# Altium PCB oscill_pcb.PcbDoc (part 2 of 2)
Units mm, origin at the board's own origin, x right, y up, seen from the top; angles counter-clockwise.
Board outline 100 x 110 mm, 4 copper layers (Top Layer, GND, Power, Bottom Layer), stack 1.565 mm thick; 124 components, 88 nets, 532 pads, 164 vias.
Unrouted connection lines stored in the file: 9.
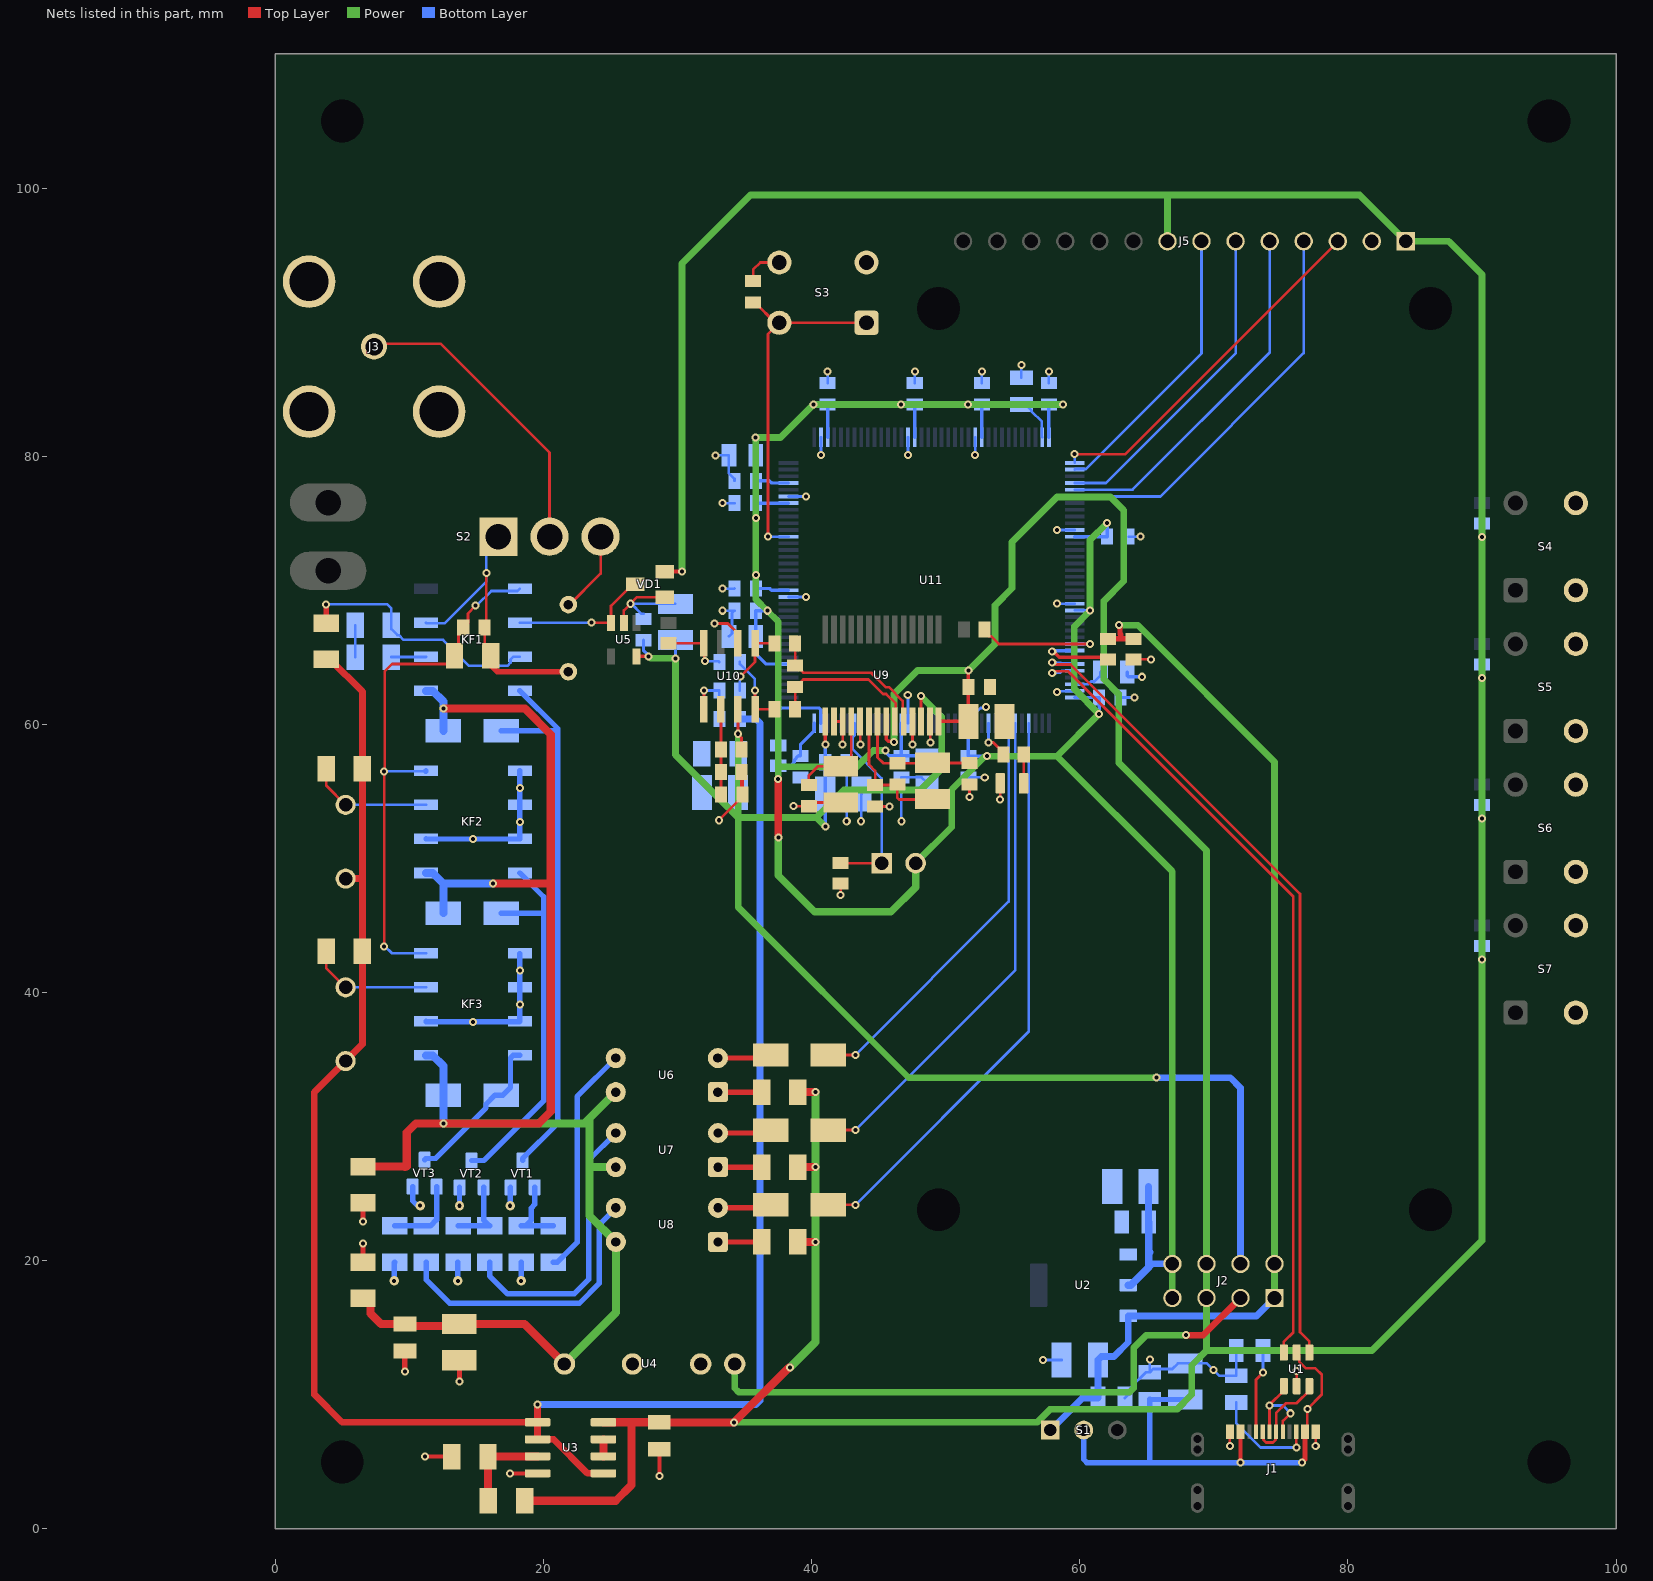
[diagram p4: the nets of this part, all layers, seen from the top]

## Via types
v1: diameter 0.6, hole 0.3, Top Layer to Bottom Layer, tented both sides, 154 vias
v2: diameter 0.7, hole 0.3, Top Layer to Bottom Layer, tented both sides, 6 vias
v3: diameter 0.6, hole 0.3, Power to Bottom Layer, tented both sides, 2 vias
v4: diameter 0.6, hole 0.3, Top Layer to GND, tented both sides, 1 vias
v5: diameter 0.6, hole 0.3, Top Layer to Power, tented both sides, 1 vias

## Nets (pads, with @x,y where several pads share a name; then routed paths per layer and width w, separated by ;. In a path a pad name is that pad's centre, name@x,y a point inside that pad or via, vN(x,y) a via of type N, cw(c..) or ccw(c..) an arc to the next point about the centre after c; other vN are vias at no path point) (continued)
GND: C1.2 C2.2 C3.2 C4.2 C5.2 C6.2 C7.2 C11.2 C12.2 C16.2 C17.2 C18.2 C19.2 C20.1 C23.2 C24.2 C25.2 C26.2 C27.2 C29.2 C30.1 C31.1 C32.1 C33.1 C34.1 C35.1 C36.1 C37.1 C38.1 C39.1 C40.2 C41.1 C42.1 C43.2 C44.2 C45.1 C46.2 C47.1 C48.1 HL1.1 J1.A1/B12 J1.B1/A12 J3.S1 J3.S2 J3.S3 J3.S4 J5.02 KF2.2 KF2.5 KF2.6 KF2.7 KF3.2 KF3.5 KF3.6 KF3.7 R1.2 R2.2 R4.1 R23.1 R30.1 R34.2 S3.3 S3.4 S4.3 S4.4 S5.3 S5.4 S6.3 S6.4 S7.3 S7.4 U1.2 U2.1 U3.4 U4.2 U5.2 U9.16 U9.17 U9.19 U9.25 U9.27 U10.6 U11.16 U11.31 U11.38 U11.51 U11.61 U11.83 U11.94 U11.107 U11.120 U11.130 VD1.1 | length 127.9
  Top Layer w0.2: U5.2@26,67.575 26,68.5 v1(26.495,68.995) 26.991,69.491 VD1.1@29.053,69.491 ; v4(32.775,67.525) 33.751,67.525 34.515,66.761 U10.6@34.515,66.05 ; v1(33.1,52.85) 33.1,52.874 34.775,54.549 R23.1@34.775,56.45 34.851,56.374 C29.2@34.851,54.775 ; C46.2@35.643,93.052 35.643,93.916 36.177,94.45 S3.4@37.6,94.45 ; v1(38.65,53.9) 39.793,53.9 C23.2@39.8,53.893 40.084,54.177 C24.2@42.181,54.177 ; U9.16@41.665,60.217 U9.17@42.325,60.217 v1(42.325,58.5) ; v1(42.175,47.265) R30.1@42.175,48.126 ; U9.19@43.62,60.217 43.635,60.202 43.635,58.515 v1(43.65,58.5) ; C20.1@44.743,53.884 44.752,53.875 v1(45.825,53.875) ; v1(47.525,58.5) v1@47.528,58.503 ; v1@47.531,58.506 v1@47.528,58.503 ; U9.25@47.532,60.217 47.528,60.213 v1@47.528,58.503 ; U9.27@48.827,60.217 48.857,60.188 48.857,58.679 v1(48.886,58.649) ; v1(51.775,54.6) C25.2@51.775,55.525 ; v1(54.071,54.384) HL1.1@54.071,55.608 ; R34.2@64.025,64.85 v1(65.3,64.85) ; v1(71.2,6.201) J1.A1/B12@71.2,7.247 ; U1.2@76.175,10.645 v1(76.176,11.776) ; v1(77.601,6.201) J1.B1/A12@77.601,7.247
  Top Layer w0.3: v1(11.175,5.4) R4.1@13.169,5.399 ; v1(17.52,4.145) U3.4@19.57,4.145 ; v1(28.65,3.95) C7.2@28.65,5.95
  Power w0.2: v1(55.65,86.787) v1@55.663,86.8
  Bottom Layer w0.2: v1(26.495,68.995) v1@26.568,68.995 ; C12.2@27.465,68.248 27.315,68.248 v1@26.568,68.995 ; C11.2@29.835,68.995 v1@26.568,68.995 ; v1(32.839,80.064) C45.1@33.836,80.064 33.836,78.721 34.25,78.307 C44.2@34.25,78.157 ; v1(33.35,68.475) C43.2@34.25,68.475 34.075,68.3 34.075,66.791 C42.1@33.844,66.56 ; v1(33.35,70.125) 34.243,70.125 C30.1@34.25,70.132 ; v1(33.35,76.5) C31.1@34.25,76.5 ; U11.16@38.28,69.5 v1(39.6,69.5) ; U11.31@38.28,77 v1(39.6,77) ; v1(40.7,80.1) U11.38@40.7,81.42 ; C32.1@41.2,85.45 v1(41.2,86.325) ; v1(42.625,52.775) C18.2@42.625,57.175 ; v1(43.7,52.775) 43.7,54.768 C19.2@43.726,54.794 ; v1(46.7,52.775) C39.1@46.7,56.05 48.206,56.05 C41.1@48.607,55.649 ; v1(47.175,62.2) 47.2,62.175 U11.130@47.2,60.08 ; v1(47.2,80.1) U11.51@47.2,81.42 ; C33.1@47.7,85.45 v1(47.7,86.325) ; C38.1@51.7,56.05 v1(52.917,56.05) ; U11.120@52.2,60.08 52.2,60.809 52.615,61.223 52.923,61.223 v1(53,61.3) ; v1(52.2,80.1) U11.61@52.2,81.42 ; C34.1@52.7,85.45 v1(52.7,86.325) ; C47.1@55.65,85.85 v1(55.65,86.787) ; v1(57.275,12.6) C3.2@58.65,12.6 ; C35.1@57.7,85.45 v1(57.7,86.325) ; v1(58.3,69) U11.94@59.62,69 ; v1(58.3,74.5) U11.83@59.62,74.5 ; v1(58.307,62.428) 58.343,62.464 59.584,62.464 U11.107@59.62,62.5 ; C37.1@63.05,62 v1(64.1,62) ; C4.2@63.368,9.758 63.818,10.208 63.818,10.568 64.925,11.675 C2.2@65.225,11.675 ; C36.1@63.65,74 v1(64.525,74) ; v1(65.225,12.65) C2.2@65.225,11.675 ; R1.2@71.668,13.307 71.668,11.432 R2.2@71.675,11.425 70.4,11.425 v1(69.975,11.85) 69.475,12.35 C1.2@67.875,12.35 67.325,12.35 66.9,11.925 65.475,11.925 C2.2@65.225,11.675
  Bottom Layer w0.25: C48.1@63.551,63.907 63.551,63.625 63.626,63.55 v1(64.65,63.55)
  Bottom Layer w0.4: KF3.2@11.25,37.855 11.278,37.828 14.723,37.828 v1(14.75,37.8) 14.778,37.828 18.223,37.828 KF3.7@18.25,37.855 v1(18.25,39.125) KF3.6@18.25,40.395 v1(18.25,41.64) KF3.5@18.25,42.91 ; KF2.2@11.25,51.46 11.255,51.455 14.745,51.455 v1(14.75,51.45) ; v1@14.755,51.455 18.245,51.455 KF2.7@18.25,51.46 v1(18.25,52.73) KF2.6@18.25,54 v1(18.25,55.27) KF2.5@18.25,56.54
GND_ISO: C8.2 C9.2 R5.1 R6.1 R17.2 R18.2 R21.2 U4.4 VT1.3 VT2.3 VT3.3 | length 14.7
  Top Layer w0.4: R6.1@6.55,19.9 v1(6.55,21.296) ; v1(6.55,22.929) R5.1@6.55,24.325 ; v1(9.675,11.725) C9.2@9.675,13.275 ; C8.2@13.725,12.575 13.75,12.55 v1(13.75,11)
  Bottom Layer w0.4: v2(8.875,18.5) 8.875,19.854 R21.2@8.921,19.9 ; VT3.3@10.246,25.531 10.248,25.529 10.248,24.475 10.563,24.159 10.754,24.159 v2(10.811,24.102) ; v2(13.625,18.5) 13.625,19.889 R18.2@13.636,19.9 ; v2(13.75,24.1) VT2.3@13.75,25.475 ; v2(17.525,24.1) 17.54,24.115 17.54,25.461 VT1.3@17.554,25.475 ; v2(18.35,18.5) R17.2@18.35,19.9
NetC1_1: C1.1 C2.1 J1.A4/B9 J1.B4/A9 S1.2 U1.5 | length 38.5
  Top Layer w0.2: U1.5@76.175,13.155 76.37,12.96 76.37,12.48 76.875,11.975 77.575,11.975 78.05,11.5 78.05,10.025 v1(76.975,8.95) 76.975,7.422 J1.B4/A9@76.8,7.247
  Top Layer w0.3: v1(72,4.939) J1.A4/B9@72,7.451
  Top Layer w0.4: v1(76.586,4.939) 76.586,4.993 76.8,5.207 J1.B4/A9@76.8,7.247
  Bottom Layer w0.4: S1.2@60.3,7.35 60.3,5.173 60.534,4.939 65.175,4.939 ; C1.1@67.875,9.65 65.25,9.65 C2.1@65.225,9.675 65.225,4.989 65.175,4.939 ; v1(76.586,4.939) v1(72,4.939) 65.175,4.939
NetC10_1: C10.1 C13.2 KF1.3 R7.2 S2.1 | length 21.9
  Top Layer w0.2: v1(15.75,71.3) 15.75,67.35 C13.2@15.625,67.225 15.625,65.575 R7.2@16.075,65.125
  Top Layer w0.4: R7.2@16.089,64.379 16.539,63.929 C10.1@21.866,63.929
  Bottom Layer w0.2: KF1.3@11.25,67.581 11.278,67.553 12.653,67.553 15.75,70.65 v1(15.75,71.3) 15.75,73.1 S2.1@16.65,74
NetC10_2: C10.2 S2.3 | length 6.2
  Top Layer w0.2: C10.2@21.856,68.821 24.27,71.235 S2.3@24.27,74
NetC13_1: C13.1 KF1.5 KF2.4 KF3.4 R7.1 | length 40.7
  Top Layer w0.2: v1(8.125,43.45) v1@8.125,56.472 ; v1(8.125,56.475) 8.125,56.529 8.167,56.571 8.167,63.956 8.71,64.498 13.37,64.498 R7.1@13.389,64.518 ; R7.1@13.375,65.125 13.375,65.425 13.675,65.725 13.675,66.875 14.375,67.575 14.375,68.275 v1(14.95,68.85)
  Bottom Layer w0.2: v1(8.125,43.45) 8.179,43.45 8.694,42.935 KF3.4@11.25,42.935 ; v1@8.158,56.508 KF2.4@11.218,56.508 ; v1(14.95,68.85) 15.025,68.85 16.121,69.946 18.075,69.946 KF1.5@18.25,70.121
  Bottom Layer w0.4: v1(8.125,56.475) v1@8.158,56.508 ; KF2.4@11.218,56.508 KF2.4@11.25,56.54
  other v1: 8.125,43.45 8.125,56.475 14.95,68.85
NetC14_2: C14.2 KF2.3 R11.1 | length 9.3
  Top Layer w0.2: R11.1@3.808,56.683 3.808,55.442 C14.2@5.25,54
  Bottom Layer w0.2: C14.2@5.25,54 KF2.3@11.25,54
NetC15_2: C15.2 KF3.3 R12.1 | length 9.3
  Top Layer w0.2: R12.1@3.806,43.075 3.806,41.835 C15.2@5.248,40.392
  Bottom Layer w0.2: C15.2@5.248,40.392 5.249,40.394 11.249,40.394 KF3.3@11.25,40.395
NetC20_2: C20.2 C21.1 C22.2 U9.20 | length 10.3
  Top Layer w0.2: U9.20@44.281,60.217 44.281,56.994 44.743,56.532 C20.2@44.743,55.484 46.384,55.484 C21.1@46.4,55.5 46.4,54.517 46.517,54.4 48.989,54.4 C22.2@49.031,54.442
NetC21_2: C21.2 C22.1 C25.1 U9.21 | length 9.7
  Top Layer w0.2: U9.21@44.916,60.217 44.916,57.534 45.35,57.1 C21.2@46.4,57.1 48.989,57.1 C22.1@49.031,57.142 49.047,57.125 C25.1@51.775,57.125
NetC23_1: C23.1 C24.1 U9.18 | length 7.1
  Top Layer w0.2: C23.1@39.8,55.493 39.8,56.2 40.477,56.877 42.31,56.877 42.96,57.527 U9.18@42.96,60.217
NetC29_1: C29.1 R22.1 R23.2 U10.2 | length 6.3
  Top Layer w0.2: U10.2@33.245,61.122 33.245,58.131 R22.1@33.251,58.125 R23.2@33.251,56.45 C29.1@33.251,54.775
NetC46_1: C46.1 S3.1 S3.2 U11.25 | length 26.9
  Top Layer w0.2: C46.1@35.643,91.452 35.793,91.452 37.295,89.95 S3.2@37.6,89.95 ; v1(36.75,74) 36.75,89.1 S3.2@37.6,89.95 ; S3.1@44.1,89.95 S3.2@37.6,89.95
  Bottom Layer w0.2: v1(36.75,74) U11.25@38.28,74
  other v1: 36.75,74
NetC47_2: C47.2 U11.71 | length 3.2
  Bottom Layer w0.2: C47.2@55.65,83.85 55.95,83.85 56.4,83.4 56.4,83.344 57.172,82.572 57.172,81.448 U11.71@57.2,81.42
NetC48_2: C48.2 U11.106 | length 2.5
  Bottom Layer w0.2: U11.106@59.62,63 60.644,63 60.839,63.195 61.101,63.195 61.551,63.645 C48.2@61.551,63.907
NetHL1_2: HL1.2 R37.2 | length 2.1
  Top Layer w0.2: HL1.2@55.821,55.608 55.821,57.747 R37.2@55.824,57.75
NetJ1_A5: J1.A5 R1.1 | length 6.3
  Top Layer w0.2: J1.A5@73.15,7.247 73.15,8.55 ; 73.15,8.55 73.15,11.125 v1(73.675,11.65)
  Bottom Layer w0.2: R1.1@73.668,13.307 73.675,13.299 v1(73.675,11.65)
  other v1: 73.675,11.65
NetJ1_A6: J1.A6 J1.B6 U1.1 | length 7.3
  Top Layer w0.2: J1.A6@74.15,7.247 v1(74.15,9.2) 74.15,9.26 75.225,10.335 U1.1@75.225,10.645 ; J1.B6@75.15,7.247 75.15,8.049 v1@75.725,8.624
  Bottom Layer w0.2: v1(74.15,9.2) 75.15,9.2 75.723,8.627 v1@75.723,8.625
  other v1: 75.725,8.625 75.725,8.625 74.15,9.2
NetJ1_A7: J1.A7 J1.B7 U1.3 | length 7.2
  Top Layer w0.2: J1.B7@73.65,7.247 73.702,7.195 73.702,6.643 73.894,6.451 74.406,6.451 74.598,6.643 74.598,7.195 J1.A7@74.65,7.247 74.65,8.653 75.369,9.371 76.161,9.371 77.125,10.335 U1.3@77.125,10.645
NetJ1_B5: J1.B5 R2.1 | length 7.9
  Top Layer w0.2: v1(76.15,6.075) J1.B5@76.15,7.247
  Bottom Layer w0.2: R2.1@71.675,9.425 71.675,7.875 73.475,6.075 v1(76.15,6.075)
  other v1: 76.15,6.075
NetJ3_1: J3.1 S2.2 | length 22.8
  Top Layer w0.2: J3.1@7.375,88.175 7.589,88.389 12.336,88.389 20.46,80.265 S2.2@20.46,74
NetJ4_01: J4.01 R30.2 U11.138 | length 14.4
  Top Layer w0.2: R30.2@42.175,49.65 J4.01@45.225,49.65
  Bottom Layer w0.2: U11.138@43.2,60.08 43.2,59.175 43.05,59.025 43.05,58.154 45.225,55.979 J4.01@45.225,49.65
NetKF1_2: KF1.2 R8.2 | length 2.6
  Bottom Layer w0.2: R8.2@8.664,65.023 11.232,65.023 KF1.2@11.25,65.041
NetKF1_6: KF1.6 U5.3 VD1.3 | length 10.5
  Top Layer w0.2: v1(23.587,67.581) 25.044,67.581 U5.3@25.05,67.575 25.05,68.838 26.653,70.441 VD1.3@26.853,70.441
  Bottom Layer w0.2: KF1.6@18.25,67.581 v1(23.587,67.581)
  other v1: 23.587,67.581
NetKF1_7: KF1.7 R9.1 R10.2 | length 19.1
  Top Layer w0.4: R10.2@3.8,67.55 v1(3.8,68.95)
  Bottom Layer w0.2: v1(3.8,68.95) 8.364,68.95 8.664,68.65 8.664,67.099 9.114,66.649 9.236,66.649 9.584,66.3 12.525,66.3 14.458,64.367 17.316,64.367 17.55,64.601 17.55,64.841 17.75,65.041 KF1.7@18.25,65.041
NetR3_1: R3.1 R4.2 U3.3 | length 7
  Top Layer w0.6: R3.1@15.9,2.1 15.885,2.115 15.885,5.384 R4.2@15.869,5.399 15.885,5.415 U3.3@19.57,5.415
NetR8_1: R8.1 R9.2 | length 2.4
  Bottom Layer w0.2: R8.1@5.964,65.023 R9.2@5.964,67.399
NetR13_1: R13.1 U6.1 | length 3.3
  Top Layer w0.4: U6.1@33.02,32.575 R13.1@36.275,32.575
NetR14_1: R14.1 U7.1 | length 3.3
  Top Layer w0.4: U7.1@33.025,26.985 36.265,26.985 R14.1@36.275,26.975
NetR15_1: R15.1 U6.3 | length 17.3
  Bottom Layer w0.4: R15.1@20.75,19.9 21.05,19.9 22.525,21.375 22.525,32.24 U6.3@25.4,35.115
NetR15_2: R15.2 R17.1 VT1.1 | length 5.9
  Bottom Layer w0.4: VT1.1@19.354,25.475 19.354,24.19 19.1,23.935 19.1,23.05 18.65,22.6 R17.1@18.35,22.6 R15.2@20.75,22.6
NetR16_1: R16.1 U7.3 | length 21.2
  Bottom Layer w0.4: R16.1@15.993,19.9 15.993,18.857 17.325,17.525 22.3,17.525 23.375,18.6 23.375,27.495 U7.3@25.405,29.525
NetR16_2: R16.2 R18.1 VT2.1 | length 5.4
  Bottom Layer w0.4: R18.1@13.636,22.6 R16.2@15.993,22.6 15.55,23.043 VT2.1@15.55,25.475
NetR19_1: R19.1 U8.1 | length 3.2
  Top Layer w0.4: U8.1@33.025,21.401 36.273,21.401 R19.1@36.274,21.4
NetR20_1: R20.1 U8.3 | length 21.7
  Bottom Layer w0.4: R20.1@11.278,19.9 11.278,18.572 13.025,16.825 22.675,16.825 24.175,18.325 24.175,22.711 U8.3@25.405,23.941
NetR20_2: R20.2 R21.1 VT3.1 | length 5.8
  Bottom Layer w0.4: R21.1@8.921,22.6 R20.2@11.278,22.6 11.578,22.6 12.046,23.068 VT3.1@12.046,25.531
NetR24_1: R24.1 R26.2 U10.4 | length 5.5
  Top Layer w0.2: v1(35.775,62.525) 35.78,62.52 35.78,61.127 35.783,61.13 R26.2@37.251,61.13
  Bottom Layer w0.2: R24.1@34.649,64.65 34.649,64.5 35.775,63.374 v1(35.775,62.525)
  other v1: 35.775,62.525
NetR24_2: R24.2 R28.1 U10.8 | length 5.1
  Top Layer w0.2: R28.1@29.325,66.05 U10.8@31.975,66.05 32.007,66.018 32.007,64.747 v1(32.04,64.715)
  Bottom Layer w0.2: v1(32.04,64.715) 33.06,64.715 R24.2@33.125,64.65
  other v1: 32.04,64.715
NetR25_1: R25.1 R27.2 U10.5 | length 5.5
  Top Layer w0.2: v1(34.699,63.574) 35.78,64.655 U10.5@35.78,66.045 ; U10.5@35.785,66.05 37.245,66.05 R27.2@37.251,66.044
  Bottom Layer w0.2: R25.1@34.649,62.525 34.649,63.524 v1(34.699,63.574)
  other v1: 34.699,63.574
NetR25_2: R25.2 R29.1 U10.1 | length 4.7
  Top Layer w0.2: U10.1@31.975,61.122 v1(31.975,62.525)
  Bottom Layer w0.2: v1(31.975,62.525) R25.2@33.125,62.525 33.126,62.524 R29.1@33.126,60.4
  other v1: 31.975,62.525
NetR31_2: R31.2 U11.143 | length 6.9
  Bottom Layer w0.25: R31.2@37.514,58.438 37.514,60.964 37.775,61.225 40.539,61.225 40.685,61.079 40.685,60.095 U11.143@40.7,60.08
NetR32_2: R32.2 U11.100 | length 9.6
  Top Layer w0.2: R32.2@52.884,67.08 52.884,66.93 53.234,66.58 53.384,66.58 53.964,66 v1(60.775,66)
  Bottom Layer w0.2: U11.100@59.62,66 v1(60.775,66)
  other v1: 60.775,66
NetR33_2: R33.2 U11.101 | length 6.1
  Top Layer w0.25: v1(57.95,65.425) 58.045,65.425 58.47,65 61.95,65 R33.2@62.1,64.85
  Bottom Layer w0.25: v1(57.95,65.425) 58.01,65.485 59.605,65.485 U11.101@59.62,65.5
  other v1: 57.95,65.425
NetR37_1: R37.1 U11.118 | length 3
  Top Layer w0.2: v1(53.2,58.65) 53.55,58.65 54.3,57.9 R37.1@54.3,57.75
  Bottom Layer w0.2: v1(53.2,58.65) U11.118@53.2,60.08
  other v1: 53.2,58.65
NetU3_6: U3.6 U3.7 | length 1.3
  Top Layer w0.6: U3.6@24.48,5.415 U3.7@24.48,6.685
NetU6_2: U6.2 VD4.P1 | length 4
  Top Layer w0.4: U6.2@33.02,35.115 36.717,35.115 VD4.P1@36.946,35.344
NetU7_2: U7.2 VD5.P1 | length 4
  Top Layer w0.4: U7.2@33.025,29.525 36.736,29.525 VD5.P1@36.955,29.744
NetU8_2: U8.2 VD7.P1 | length 4
  Top Layer w0.4: U8.2@33.025,23.941 36.718,23.941 VD7.P1@36.946,24.169
REL_x1: U11.115 VD4.P2 | length 31.5
  Top Layer w0.2: VD4.P2@41.246,35.344 v1(43.269,35.344)
  Bottom Layer w0.2: v1(43.269,35.344) 54.7,46.775 U11.115@54.7,60.08
  other v3: 43.269,35.344
REL_x10: U11.114 VD5.P2 | length 37.3
  Top Layer w0.2: VD5.P2@41.255,29.744 v1(43.278,29.744)
  Bottom Layer w0.2: v1(43.278,29.744) 55.2,41.666 U11.114@55.2,60.08
REL_x20: U11.112 VD7.P2 | length 43.3
  Top Layer w0.2: VD7.P2@41.246,24.169 v1(43.269,24.169)
  Bottom Layer w0.2: v1(43.269,24.169) 56.2,37.1 U11.112@56.2,60.08
SPI_CS: J5.03 U11.73 | length 26.9
  Top Layer w0.2: v1(59.625,80.15) 59.635,80.14 63.36,80.14 J5.03@79.245,96.025
  Bottom Layer w0.2: U11.73@59.62,79.5 59.625,79.505 v1(59.625,80.15)
  other v1: 59.625,80.15
SPI_DC: J5.05 U11.77 | length 27.1
  Bottom Layer w0.2: U11.77@59.62,77.5 63.95,77.5 74.165,87.715 J5.05@74.165,96.025
SPI_MOSI: J5.06 U11.76 | length 24.4
  Bottom Layer w0.2: U11.76@59.62,78 61.95,78 71.625,87.675 J5.06@71.625,96.025
SPI_RES: J5.04 U11.78 | length 29.9
  Bottom Layer w0.2: U11.78@59.62,77 66.025,77 76.705,87.68 J5.04@76.705,96.025
SPI_SCK: J5.07 U11.74 | length 21.4
  Bottom Layer w0.2: U11.74@59.62,79 59.66,79.04 60.459,79.04 69.085,87.666 J5.07@69.085,96.025
USB_contr_N: U1.4 U11.103 | length 61.8
  Top Layer w0.2: v1(57.95,64.6) 58.058,64.6 58.196,64.462 59.319,64.462 76.425,47.357 76.425,14.675 77.125,13.975 U1.4@77.125,13.155
  Bottom Layer w0.2: v1(57.95,64.6) 58.55,64.6 58.61,64.54 59.58,64.54 U11.103@59.62,64.5
USB_contr_P: U1.6 U11.104 | length 61
  Top Layer w0.2: v1(57.95,63.825) 58.058,63.825 58.196,63.963 59.112,63.963 75.925,47.15 75.925,14.662 75.225,13.962 U1.6@75.225,13.155
  Bottom Layer w0.2: v1(57.95,63.825) 58,63.875 58.55,63.875 58.675,64 U11.104@59.62,64
VCC_3.3V: C5.1 C6.1 C30.2 C31.2 C32.2 C33.2 C34.2 C35.2 C36.2 C37.2 C38.2 C39.2 C40.1 C41.2 C42.2 C43.1 C44.1 C45.2 J2.07 J2.08 J4.02 R31.1 U2.2 U11.6 U11.17 U11.30 U11.33 U11.39 U11.52 U11.62 U11.72 U11.84 U11.95 U11.108 U11.121 U11.131 U11.144 | length 226.2
  Top Layer w0.25: v1(37.514,55.911) v1@37.52,55.905
  Top Layer w0.55: v1@37.52,51.58 v1@37.52,55.905
  Power w0.5: v1(37.514,55.911) 37.514,67.661 v1(36.7,68.475) 35.85,69.325 v1(35.85,71.125) v1(35.85,75.4) 35.843,75.407 35.843,81.382 v1(35.836,81.389) 37.689,81.389 v1(40.15,83.85) v1(46.675,83.85) v1(51.675,83.85) v1(58.74,83.85) ; 37.55,56.85 43.4,56.85 44.6,58.05 v1(45.5,58.05) ; J4.02@47.765,49.65 50.459,52.344 50.459,55.134 52.95,57.625 v1(53.1,57.625) 58.3,57.625 ; v1(62.05,75.025) 60.762,73.737 v1(60.762,68.5) 60.762,68.473 59.6,67.311 59.6,62.625 v1(61.45,60.775) 58.3,57.625 ; J2.07@66.91,17.225 J2.08@66.91,19.765 66.91,49.015 58.3,57.625
  Power w0.55: v1(37.525,51.575) 37.525,48.725 40.225,46.025 45.925,46.025 47.765,47.865 J4.02@47.765,49.65
  Bottom Layer w0.2: v1(46.675,83.85) C33.2@47.7,83.85 ; v1(51.675,83.85) C34.2@52.7,83.85 ; U11.95@59.62,68.5 v1(60.762,68.5)
  Bottom Layer w0.25: v1(35.836,81.389) C45.2@35.836,80.064 35.836,78.171 C44.1@35.85,78.157 36.864,78.157 37.021,78 U11.33@38.28,78 ; v1(35.85,71.125) C30.2@35.85,70.132 36.876,70.132 37.009,70 U11.17@38.28,70 ; v1(35.85,75.4) C31.2@35.85,76.5 U11.30@38.28,76.5 ; v1(36.7,68.475) C43.1@35.85,68.475 35.844,68.469 C42.2@35.844,66.56 35.844,65.281 36.625,64.5 U11.6@38.28,64.5 ; v1(37.514,55.911) R31.1@37.514,56.914 38.439,56.914 38.7,57.175 38.7,57.325 39.025,57.65 C40.1@39.175,57.65 39.175,58.475 40.17,59.47 40.185,59.47 40.2,59.485 U11.144@40.2,60.08 ; v1(40.15,83.85) C32.2@41.2,83.85 U11.39@41.2,81.42 ; v1(45.5,58.05) 45.5,57.958 45.808,57.65 C39.2@46.7,57.65 ; U11.131@46.7,60.08 C39.2@46.7,57.65 ; U11.52@47.7,81.42 C33.2@47.7,83.85 ; C41.2@48.606,57.65 C39.2@46.7,57.65 ; U11.121@51.7,60.08 C38.2@51.7,57.65 51.725,57.625 v1(53.1,57.625) ; U11.62@52.7,81.42 C34.2@52.7,83.85 ; U11.72@57.7,81.42 C35.2@57.7,83.85 v1(58.74,83.85) ; U11.108@59.62,62 C37.2@61.45,62 v1(61.45,60.775) ; U11.84@59.62,74 C36.2@62.05,74 v1(62.05,75.025)
  Bottom Layer w0.5: 65.14,19.505 65.4,19.765 J2.08@66.91,19.765
  Bottom Layer w0.55: U2.2@63.62,18.175 63.81,18.175 65.14,19.505 65.14,20.55 ; C5.1@65.125,25.525 65.133,25.517 65.133,22.888 C6.1@65.14,22.881 65.14,20.55 ; 65.215,20.625 65.14,20.55
VCC_3.3V_PERIPH: C7.1 C16.1 C17.1 J2.05 J2.06 J5.01 J5.08 R3.2 R13.2 R14.2 R19.2 R35.1 R36.2 R38.1 R39.2 U3.8 U9.22 U9.28 VD1.2 | length 390.1
  Top Layer w0.25: U9.22@45.576,60.217 45.576,58.888 45.723,58.742 46.096,58.742 v1(46.15,58.688) ; U9.28@49.462,60.217 49.47,60.225 C17.1@51.7,60.225 C17.1@51.7,60.225 C16.1@51.699,62.781 C16.1@51.699,62.781 v1(51.7,64.025)
  Top Layer w0.3: VD1.2@29.053,71.391 v1(30.346,71.391)
  Top Layer w0.6: R3.2@18.6,2.1 25.4,2.1 26.565,3.265 26.565,7.955 ; U3.8@24.48,7.955 26.565,7.955 ; C7.1@28.65,7.95 v1(34.225,7.95) 38.325,12.05 v1(38.4,12.05) ; C7.1@28.65,7.955 26.565,7.955 ; R19.2@38.974,21.4 v1(40.3,21.4) ; R14.2@38.975,26.975 v1(40.301,26.975) ; R13.2@38.975,32.575 v1(40.301,32.575)
  Power w0.5: v1(30.346,71.391) 30.346,94.371 35.45,99.475 66.475,99.475 ; v1(34.225,7.95) 56.814,7.95 57.782,8.918 67.261,8.918 68.355,10.013 68.355,12.205 69.45,13.3 ; v1(46.15,58.688) 46.15,62.275 47.9,64.025 v1(51.7,64.025) 53.675,66 53.675,68.875 54.95,70.15 54.95,73.6 58.3,76.95 62.3,76.95 63.275,75.975 63.275,70.675 61.8,69.2 61.8,63.362 62.9,62.262 62.9,57.144 69.45,50.594 J2.06@69.45,19.765 J2.05@69.45,17.225 69.45,13.3 ; J5.08@66.545,96.025 66.545,99.405 66.475,99.475 ; 66.475,99.475 80.875,99.475 J5.01@84.325,96.025 87.525,96.025 90,93.55 v1(90,73.975) v1(90,63.475) v1(90,52.975) v1(90,42.475) 90,21.5 81.8,13.3 69.45,13.3
  Power w0.6: v1(38.4,12.05) 40.3,13.95 v1(40.3,21.4) 40.301,21.401 v1(40.301,26.975) v1(40.301,32.575)
  Bottom Layer w0.3: v1(90,42.475) R39.2@90,43.476 ; v1(90,52.975) R38.1@90,53.976 ; v1(90,63.475) R36.2@90,64.476 ; v1(90,73.975) R35.1@90,74.976
VCC_5V: C3.1 C4.1 J2.01 J2.02 R33.1 R34.1 S1.1 U2.3 | length 82.5
  Top Layer w0.4: R33.1@62.1,66.374 63.063,66.374 ; v1(62.918,67.418) 62.955,67.418 63.002,67.371 63.002,66.754 63.063,66.693 63.063,66.374 ; R34.1@64.025,66.374 63.063,66.374
  Power w0.5: v1(62.918,67.418) 62.937,67.398 64.327,67.398 74.53,57.195 J2.02@74.53,19.765 J2.01@74.53,17.225
  Bottom Layer w0.5: S1.1@57.8,7.35 60.208,9.758 C4.1@61.368,9.758 61.368,12.582 C3.1@61.35,12.6 61.614,12.864 62.564,12.864 63.62,13.92 U2.3@63.62,15.885 73.19,15.885 J2.01@74.53,17.225
VCC_5V_ISO: C8.1 C9.1 KF1.1 KF2.1 KF3.1 R5.2 R6.2 U4.6 U6.4 U7.4 U8.4 VD2.P2 VD3.P2 VD6.P2 | length 129.6
  Top Layer w0.6: R6.2@6.55,17.2 6.749,17.2 7.099,16.85 7.099,16.076 7.9,15.275 C9.1@9.675,15.275 9.811,15.139 13.589,15.139 C8.1@13.725,15.275 18.595,15.275 U4.6@21.57,12.3 ; R5.2@6.55,27.025 9.65,27.025 9.675,27 ; 9.811,27.025 9.811,29.561 10.486,30.236 v1@12.55,30.236 ; v1(12.55,30.25) 19.675,30.25 20.55,31.125 20.55,48.15 ; v1(12.55,61.175) 18.625,61.175 20.55,59.25 20.55,48.15 ; v1(16.245,48.12) 20.52,48.12 20.55,48.15
  Power w0.6: v1(12.55,30.25) 23.075,30.25 23.45,30.625 ; U4.6@21.57,12.3 25.405,16.135 U8.4@25.405,21.401 23.45,23.356 23.45,26.991 ; U6.4@25.4,32.575 23.45,30.625 ; U7.4@25.405,26.985 23.456,26.985 23.45,26.991 ; 23.45,26.991 23.45,30.625
  Bottom Layer w0.6: KF3.1@11.25,35.315 11.75,35.315 12.55,34.515 VD6.P2@12.55,32.344 v1(12.55,30.25) ; KF2.1@11.25,48.92 11.75,48.92 12.55,48.12 ; KF1.1@11.25,62.501 11.75,62.501 12.55,61.701 v1(12.55,61.175) VD2.P2@12.55,59.525 ; VD3.P2@12.55,45.925 12.55,48.12 ; v1(16.245,48.12) 12.55,48.12
VCC_5V_ISO1: J2.03 U4.1 | length 44.3
  Top Layer w0.5: v5(67.925,14.45) 69.215,14.45 J2.03@71.99,17.225
  Power w0.5: U4.1@34.27,12.3 34.27,10.493 34.563,10.2 63.732,10.2 64.025,10.493 64.025,13.5 64.975,14.45 v5(67.925,14.45)
VCC_5V_PERIPH: C11.1 C12.1 C18.1 C19.1 C26.1 C27.1 J2.04 R22.2 U5.5 U9.15 U9.26 U10.3 | length 129.5
  Top Layer w0.2: U10.3@34.515,61.122 34.52,61.117 34.52,59.305 v1(34.525,59.3) 34.525,59.248 34.775,58.998 R22.2@34.775,58.125 ; U9.15@41.027,60.215 U9.15@41.03,60.217 ; U9.26@48.158,60.226 U9.26@48.167,60.217
  Top Layer w0.25: U5.5@26.95,65.075 v1(27.85,65.075) ; v1@41.027,58.502 U9.15@41.027,60.215 ; U9.26@48.158,60.226 v1@48.158,62.092
  Power w0.5: v1(27.85,65.075) 27.877,65.075 28.027,64.925 v1(29.85,64.925) 29.85,57.725 34.525,53.05 ; v1(34.525,59.3) 34.525,53.05 ; v1(41.026,52.374) 40.35,53.05 ; v1(48.15,62.1) 49.7,60.55 49.7,56.675 48.125,55.1 42.4,55.1 40.35,53.05 ; v3(65.725,33.65) 47.25,33.65 34.525,46.375 34.525,53.05 ; 34.525,53.05 40.35,53.05
  Bottom Layer w0.2: C26.1@34.525,54.919 C27.1@34.525,57.825 v1(34.525,59.3)
  Bottom Layer w0.25: C12.1@27.465,66.273 27.465,65.523 27.85,65.138 v1(27.85,65.075) ; C11.1@29.846,66.284 29.85,66.28 v1(29.85,64.925) ; v1(41.025,58.5) C18.1@41.025,57.175 C19.1@41.026,54.794 C19.1@41.026,54.794 v1(41.026,52.374)
  Bottom Layer w0.5: v3(65.725,33.65) 71.232,33.65 71.99,32.892 J2.04@71.99,19.765
VIN_N: C28.2 R27.1 U9.24 | length 12.4
  Top Layer w0.2: R27.1@38.775,66.044 C28.2@38.775,64.4 38.925,64.4 39.275,64.05 39.275,63.967 39.392,63.85 44.451,63.85 45.53,62.771 45.773,62.771 46.791,61.753 46.791,60.297 U9.24@46.872,60.217
VIN_P: C28.1 R26.1 U9.23 | length 11.6
  Top Layer w0.2: R26.1@38.775,61.13 C28.1@38.775,62.8 38.925,62.8 39.275,63.15 39.275,63.233 39.392,63.35 44.244,63.35 45.323,62.271 45.566,62.271 46.291,61.546 46.291,60.297 U9.23@46.211,60.217
Virt_GND: C14.1 C15.1 R10.1 R11.2 R12.2 R29.2 U3.1 U3.2 U3.5 | length 153.8
  Top Layer w0.5: R10.1@3.8,64.85 4.1,64.85 6.508,62.442 R11.2@6.508,56.683 6.508,48.525 ; C14.1@5.25,48.5 6.483,48.5 6.508,48.525 ; R12.2@6.506,43.075 6.506,36.15 C15.1@5.248,34.892 2.925,32.569 2.925,10.025 4.995,7.955 U3.1@19.57,7.955 ; R12.2@6.508,43.077 6.508,48.525 ; v1(19.575,9.275) 19.57,9.27 U3.1@19.57,7.955 ; U3.5@24.48,4.145 23.305,4.145 20.765,6.685 U3.2@19.57,6.685 U3.1@19.57,7.955
  Bottom Layer w0.5: v1(19.575,9.275) 35.857,9.275 36.15,9.568 36.15,60.107 35.857,60.4 R29.2@34.65,60.4
  other v1: 19.575,9.275
x1_coil2: KF1.8 VD2.P1 VT1.2 | length 41.6
  Bottom Layer w0.4: VD2.P1@16.85,59.525 20.924,59.525 21.075,59.676 ; KF1.8@18.25,62.501 21.075,59.676 ; VT1.2@18.454,27.475 18.454,27.625 21.075,30.246 21.075,59.676
x10_coil2: KF2.8 VD3.P1 VT2.2 | length 28.1
  Bottom Layer w0.4: VT2.2@14.65,27.475 15.575,27.475 20.025,31.925 20.025,45.975 ; VD3.P1@16.85,45.925 19.975,45.925 20.025,45.975 ; KF2.8@18.25,48.92 20.025,47.145 20.025,45.975
x20_coil2: KF3.8 VD6.P1 VT3.2 | length 11.8
  Bottom Layer w0.4: VT3.2@11.146,27.531 11.243,27.627 11.962,27.627 15.725,31.391 15.725,31.669 16.4,32.344 16.975,32.344 17.55,32.919 17.55,35.115 17.75,35.315 KF3.8@18.25,35.315
pads on no net: J1. J1.13 J1.14 J1.15 J1.16 J1.A8 J1.B8 J5.09 J5.10 J5.11 J5.12 J5.13 J5.14 KF1.4 S1.3 S2.4 S2.5 U2.4 U9.14 U10.7 U11.1 U11.2 U11.7 U11.8 U11.9 U11.10 U11.11 U11.12 U11.13 U11.14 U11.15 U11.18 U11.19 U11.20 U11.21 U11.22 U11.23 U11.24 U11.26 U11.27 U11.28 U11.29 U11.32 U11.34 U11.35 U11.36 U11.37 U11.40 U11.41 U11.43 U11.44 U11.45 U11.46 U11.47 U11.48 U11.49 U11.50 U11.53 U11.54 U11.55 U11.56 U11.57 U11.58 U11.59 U11.60 U11.63 U11.64 U11.65 U11.66 U11.67 U11.68 U11.69 U11.70 U11.75 U11.79 U11.80 U11.81 U11.82 U11.85 U11.86 U11.91 U11.92 U11.93 U11.102 U11.105 U11.109 U11.110 U11.117 U11.119 U11.122 U11.123 U11.124 U11.125 U11.126 U11.127 U11.128 U11.129 U11.132 U11.133 U11.134 U11.137 U11.139 U11.140 U11.141 U11.142

## Polygon pours and split planes (outlines as drawn)
GND on GND "NONET_L02_P-001" (solid, remove dead copper, pour order 1): 0,0 100,0 100,110 0,110
GND_ISO on GND "NONET_L02_P-001" (solid, remove dead copper, pour order 0): 4.625,10.163 4.625,32.075 9.75,32.075 9.75,35.838 19.75,35.838 19.75,44.45 9.75,44.45 9.75,49.425 19.75,49.425 19.75,58.05 9.75,58.05 9.75,63 28.1,63 28.1,10.163

## Silkscreen, mask and mechanical layers (free items; w line width, h text height)
Top Overlay:
  text "Reset" at 38.825,87.375 h1.2
  text "Auto" at 90.2,75.075 h1.2 r270
  text "Mode" at 90.15,64.625 h1.2 r270
  text "+" at 90.1,51.675 h1.2
  text "-" at 91.439,41.075 h1.2 r90
  text "3.3V" at 67.5,21.75 h1.2 r90
  text "3.3V_perif" at 69.875,21.75 h1.2 r90
  text "5V" at 75.15,21.7 h1.2 r90
  text "5V_perif" at 72.45,21.675 h1.2 r90
  text "5V_ISO" at 72.7,9.975 h1.2 r90
Mechanical 1:
  the board outline again, w0.254

## Text inside footprints (layer, text, board x,y; h text height)
J1: Top Overlay "*" at 69.523,6.6 h1.27; Mechanical 13 "*" at 69.523,6.6 h1.27